# Altium PCB logi-edu.PcbDoc (part 2 of 2)
Units mil, origin at the board's own origin, x right, y up, seen from the top; angles counter-clockwise.
Board outline 3607 x 2055 mil, 4 copper layers (Top Layer, Mid-Layer 1, Mid-Layer 2, Bottom Layer); 75 components, 66 nets, 321 pads, 127 vias.
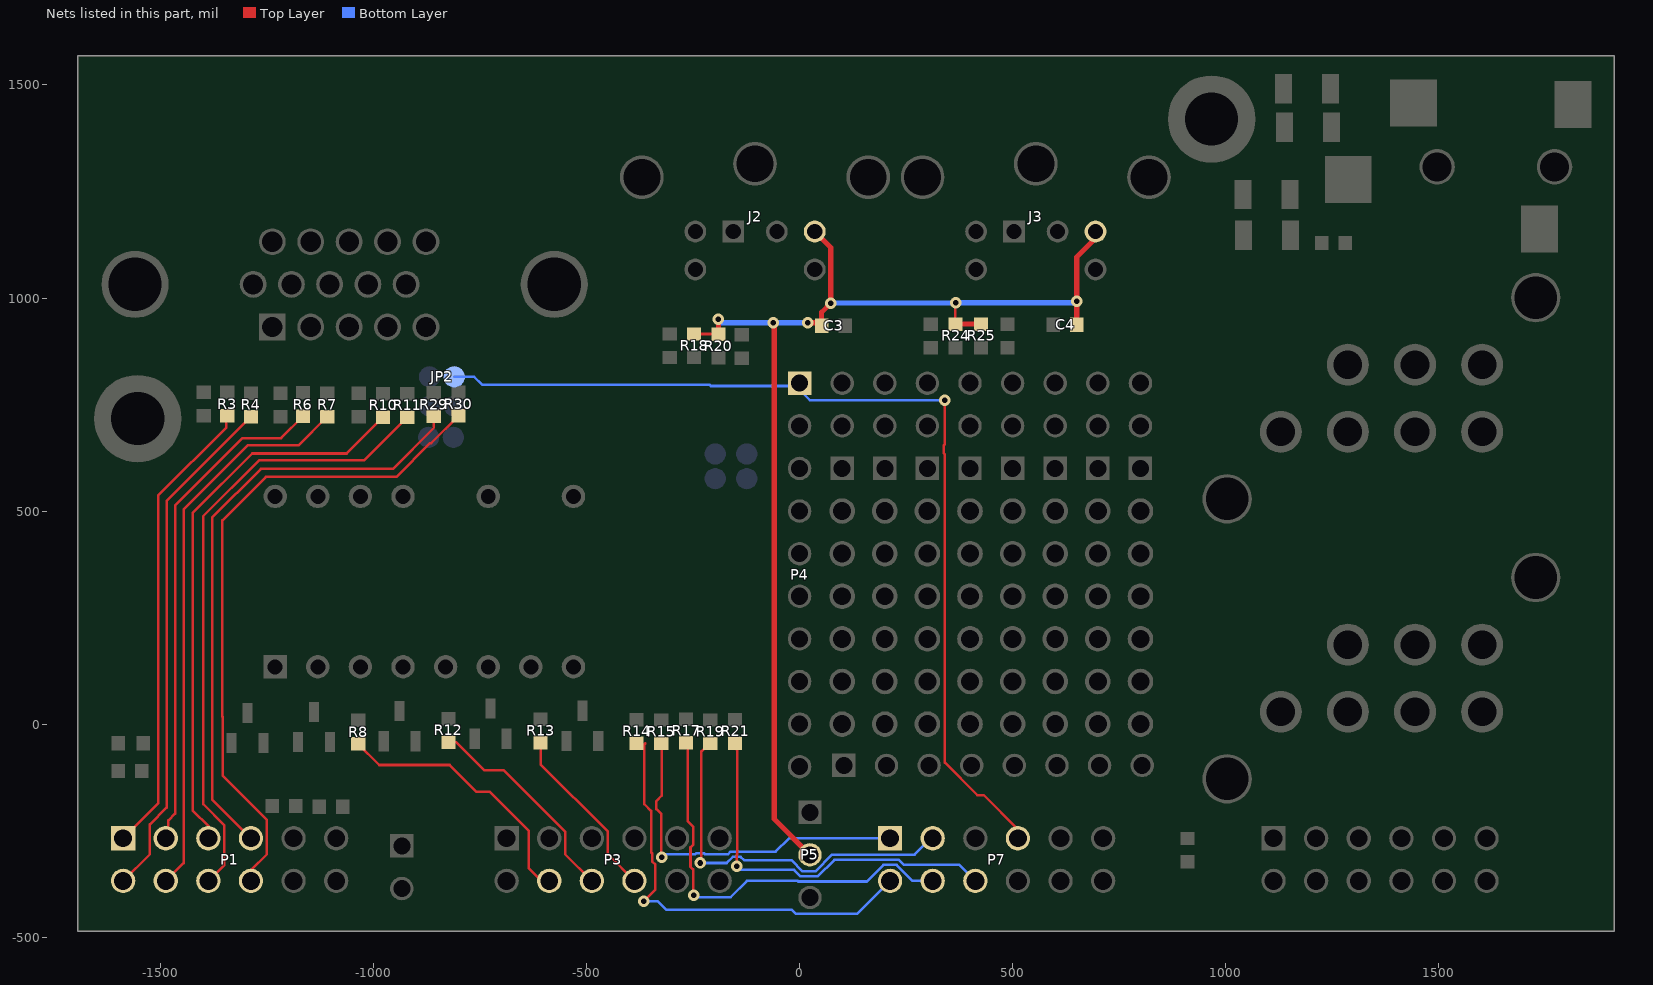
[diagram p2: the nets of this part, all layers, seen from the top]

## Via types
v1: diameter 27, hole 13, Top Layer to Bottom Layer, 127 vias

## Nets (pads, with @x,y where several pads share a name; then routed paths per layer and width w, separated by ;. In a path a pad name is that pad's centre, name@x,y a point inside that pad or via, vN(x,y) a via of type N, cw(c..) or ccw(c..) an arc to the next point about the centre after c; other vN are vias at no path point) (continued)
SSEG0_A: P7.8 R17.2 | length 977.7
  Top Layer w6: R17.2@-262.06,-45.56 -262.06,-228.47 -250.06,-240.47 -250.06,-283.53 -256.06,-289.53 -256.06,-335.32 -250.06,-341.32 -250.06,-400.5 v1(-248.56,-402)
  Bottom Layer w6: v1(-248.56,-402) -244.56,-406 -161.56,-406 -123.56,-368 -4.12,-368 -2.62,-369.5 157.91,-369.5 196.91,-330.5 227.97,-330.5 265.47,-368 P7.8@312.44,-368
SSEG1_B: P7.7 R14.2 | length 1016.2
  Top Layer w6: v1(-366,-416) -338.56,-388.56 -338.56,-329.82 -346.06,-322.32 -346.06,-303.68 -348.56,-301.18 -348.56,-203.79 -364.56,-187.79 -364.56,-47.56 -362.56,-45.56
  Bottom Layer w6: v1(-366,-416) -332.6,-416 -312.6,-436 -18.29,-436 -8.79,-445.5 134.94,-445.5 P7.7@212.44,-368
SSEG2_C: P7.2 R19.2 | length 893.5
  Top Layer w6: v1(-233.56,-326) -230.56,-323 -230.56,-64.31 R19.2@-211.81,-45.56
  Bottom Layer w6: v1(-233.56,-326) -171.38,-326 -156.88,-311.5 -138.24,-311.5 -130.24,-319.5 -18.68,-319.5 7.32,-345.5 37.56,-345.5 76.56,-306.5 269.94,-306.5 P7.2@315.44,-261
SSEG3_D: P3.8 R8.2 | length 644.6
  Top Layer w6: R8.2@-1036,-46.56 -986.56,-96 -821.56,-96 -758.56,-159 -726.83,-159 -636,-249.83 -636,-338 -592,-382 P3.8@-592,-375 ; P3.8@-590,-375 P3.8@-590,-372
SSEG4_E: P3.9 R12.2 | length 505.9
  Top Layer w6: R12.2@-824,-42.56 -806,-42.56 -740.56,-108 -694.53,-108 -550.06,-252.47 -550.06,-305.5 P3.9@-488.56,-367 ; P3.9@-487.56,-368 P3.9@-488.56,-367 ; P3.9@-485,-367 P3.9@-488.56,-367
SSEG5_F: P7.9 R21.2 | length 901.5
  Top Layer w6: R21.2@-161.56,-45.56 -146.56,-60.56 -146.56,-305 -147.56,-306 v1(-147.56,-334)
  Bottom Layer w6: v1(-147.56,-334) -139.56,-342 -13.15,-342 2.35,-357.5 42.53,-357.5 81.53,-318.5 232.94,-318.5 244.94,-330.5 374.94,-330.5 P7.9@412.44,-368
SSEG6_G: P7.1 R15.2 | length 838.8
  Top Layer w6: v1(-323.56,-313) -325.06,-311.5 -325.06,-210.32 -336.06,-199.32 -336.06,-180.68 -323.56,-168.18 -323.56,-56.81 R15.2@-312.31,-45.56
  Bottom Layer w6: v1(-323.56,-313) -316.06,-305.5 -244.88,-305.5 -242.88,-303.5 -224.24,-303.5 -222.24,-305.5 -167.85,-305.5 -161.85,-299.5 -56.06,-299.5 -24.56,-268 P7.1@212.44,-268
SSEG7_DP: P3.10 R13.2 | length 415.8
  Top Layer w6: R13.2@-608,-43.56 -608,-94.53 -450.06,-252.47 -450.06,-305.5 P3.10@-387.56,-368
VDD_PS2: C3.2 C4.2 J2.4 J3.4 P5.2 R18.2 R20.2 R24.2 R25.2 | length 2782.3
  Top Layer w6: R18.2@-247.56,915.56 -191.56,915.56 R20.2@-190.56,914.56 ; R24.2@365.44,938.56 365.44,988 v1(366.44,989)
  Top Layer w12: R20.2@-190.56,914.56 v1(-190.56,950) ; v1(-61.56,942) -59.56,940 -59.56,-223 P5.2@24.44,-307 ; v1(19.44,942) 51.88,942 51.88,966.69 v1(73.19,988) 73.19,1118.39 J2.4@35.6,1155.98 ; R24.2@366,938.56 R25.2@426,938.56 ; C4.2@650.56,937 650.56,1096.56 J3.4@701,1147
  Bottom Layer w12: v1(-190.56,950) -182.56,942 v1(-61.56,942) v1(19.44,942) ; v1(73.19,988) 365.44,988 v1(366.44,989) 647.44,989 v1(650.44,992)
VGA_B1: P1.9 R11.1 | length 1467.3
  Top Layer w6: P1.9@-1387.56,-368 -1350.06,-330.5 -1350.06,-237.5 -1399.56,-188 -1399.56,488 -1268.56,619 -1022,619 R11.1@-920.56,720.44
VGA_B2: P1.3 R10.1 | length 1319.5
  Top Layer w6: P1.3@-1387.56,-268 -1386.56,-267 -1386.56,-240.88 -1424.56,-202.88 -1424.56,495 -1284.56,635 -1063,635 R10.1@-977.56,720.44
VGA_G0_IO1: JP2.1 P4.1 P7.4 | length 2305.2
  Top Layer w6: v1(340.44,760) 340.94,759.5 340.94,656.76 338.5,654.32 338.5,635.68 340.94,633.24 340.94,-90.5 417.44,-167 432.44,-167 512.44,-247 P7.4@512.44,-268
  Bottom Layer w6: JP2.1@-810.56,815 -763.56,815 -745.06,796.5 -211.32,796.5 -208.32,793.5 -22.5,793.5 P4.1@-16,800 ; P4.1@0,800 P4.1@-16,800 ; v1(340.44,760) 24,760 P4.1@-16,800
VGA_G1: P1.8 R7.1 | length 1316.5
  Top Layer w6: P1.8@-1487.56,-368 -1445.56,-326 -1445.56,504 -1295.56,654 -1176,654 R7.1@-1108.56,721.44
VGA_G2: P1.2 R6.1 | length 1176.9
  Top Layer w6: P1.2@-1487.56,-268 -1481.56,-262 -1481.56,-225.94 -1465.56,-209.94 -1465.56,513 -1307.56,671 -1217,671 R6.1@-1165.56,722.44
VGA_HS: P1.4 R29.2 | length 1425.1
  Top Layer w6: P1.4@-1287.56,-268 -1378.56,-177 -1378.56,485 -1264.56,599 -954.56,599 -858.56,695 R29.2@-858.56,722.44
VGA_R1: P1.7 R4.1 | length 1226.7
  Top Layer w6: P1.7@-1597,-377 P1.7@-1587.78,-367.78 ; P1.7@-1587.56,-368 -1525.06,-305.5 -1525.06,-235.5 -1485.56,-196 -1485.56,523.44 R4.1@-1287.56,721.44
VGA_R2: P1.1 R3.1 | length 1091.7
  Top Layer w6: P1.1@-1587.56,-268 -1505.56,-186 -1505.56,536 -1345.56,696 R3.1@-1345.56,723.44
VGA_VS: P1.10 R30.2 | length 1569.3
  Top Layer w6: P1.10@-1287,-377 -1287,-342.44 -1250.06,-305.5 -1250.06,-224.71 -1354.21,-120.55 -1354.21,17.35 -1354.56,17.69 -1354.56,478 -1252.56,580 -946.56,580 -867.06,659.5 -864.5,659.5 R30.2@-800.56,723.44
pads on no net: J1.4 J1.9 J1.11 J1.12 J1.15 J1.X J2.2 J2.6 J2.x J3.2 J3.6 J3.x J4.5 J4.6 J4.8 J4.9 J5.5 J5.6 J5.8 J5.9 J6.4 J6.H1 J6.H2 P3.6 P3.12 P7.6 P7.12 P8.6 P8.12 P11.1 P12.1 P13.1 P14.1 P15.1 P16.1 SSEG1.9

## Polygon pours and split planes (outlines as drawn)
GND on Bottom Layer "GND_BOT" (solid, remove dead copper, pour order 4): -1682.56,1559 -1682.56,-486 1875,-486 1875,1532.78 1875,1559 -1682.56,1559
GND on Top Layer "GND_TOP" (solid, remove dead copper, pour order 3): -1696.56,1560 -1696.56,-486 1875,-486 1875,1533.77 1875,1560 -1696.56,1560

## Keep-outs
Keep-Out Layer:
  the board outline again, w30

## Silkscreen, mask and mechanical layers (free items; w line width, h text height)
Top Overlay:
  lines w10: -37.19,851 846.06,851 ; -36.75,851 -36.75,-140 37.5,-140 ; 37,759 382,759 ; 37.5,-60 846.5,-60 846.5,-140 ; 37.5,851 37.5,-140 ; 38,552 348,552 ; 39,660 372,660 ; 277.44,985 308.25,985 ; 513,758 843,758 844,759 ; 526,659 845,659 ; 540,552 845,552 ; 846.5,851 846.5,-140 ; 37.5,-140 846.5,-140
  text "VGA" at -1028.56,1556 h80 r180
  text "PS2-2" at 1.44,1553 h80 r180
  text "PS2-1 - DEFAULT" at 828.44,1552 h80 r180
  text "AUDIO" at 1738,1542 h80 r180
  text "S1" at 111,859 h60 r90
  text "S2" at 216,859 h60 r90
  text "S8" at 813,859 h60 r90
  text "S7" at 716,858 h60 r90
  text "IO1" at -79.17,855.51 h50 r270
  text "GND" at 892,777 h60
  text "IO2" at -79.17,752.39 h50 r270
  text "GND" at 394,734 h60
  text "VEXT" at 892,696 h60
  text "NES2" at 1894.44,686 h80 r90
  text "IO3" at -80.56,645 h50 r270
  text "VEXT" at 387,633 h60
  text "SERVO" at 892,604 h60
  text "S1" at 167,570 h60 r90
  text "S2" at 268,568 h60 r90
  text "IO4" at -79.17,535.33 h50 r270
  text "SERVO" at 366,533 h60
  text "IO5" at -79.17,435.49 h50 r270
  text "IO6" at -79.17,335.19 h50 r270
  text "IO7" at -79.17,228.9 h50 r270
  text "IO8" at -79.07,131.19 h50 r270
  text "NES1" at 1892.44,60 h80 r90
  text "IO9" at -79.17,38.82 h50 r270
  text "PWR" at -1628.56,-18 h60
  text "IO10" at -80.56,-56 h50 r270
  text "3V" at 182.44,-184 h60
  text "3V" at 277.44,-184 h60
  text "3V" at 376.44,-184 h60
  text "----" at 718.44,-184 h60
  text "3V" at 95.44,-185 h60
  text "----" at 489.44,-186 h60
  text "GND" at 592.44,-187 h60
  text "VEXT" at -156,-222 h60
  text "5V" at -837.56,-306 h60 r90
  text "PS2" at -124.56,-325 h60
  text "MAX!" at -787.56,-336 h60 r90
  text "3V3" at -125.56,-419 h60
  text "EXT VIN" at -991.56,-441 h60 r90
  text "GND" at -836.56,-444 h60 r90
  text "PS2 V SEL" at 122.44,-451 h60 r90
Bottom Overlay:
  lines w10: 37.5,-60 846.5,-60 846.5,-140 ; 38,759 387,759 ; 39.81,840 37.5,837.69 37.5,-140 ; 40,552 352,552 ; 41,660 368,660 ; 513,758 843,758 844,759 ; 516,659 847,659 ; 531,552 845,552 ; 37.5,-140 -36.75,-140 -36.75,840 846.5,840 846.5,-140 ; 37.5,-140 846.5,-140
  text "S8" at 816,910 h60 r90
  text "S2" at 214,907 h60 r90
  text "S7" at 719,906 h60 r90
  text "S1" at 112,904 h60 r90
  text "G3" at -908.56,791 h80
  text "GND" at 973,778 h60
  text "IO1" at -79.56,765 h50 r270
  text "PS2-SERVO" at -239,755 h60 r90
  text "GND" at 504,733 h60
  text "B3" at -915.56,722 h80
  text "VEXT" at 990,681 h60
  text "IO2" at -79.56,665 h50 r270
  text "R3" at -914.56,649 h80
  text "VEXT" at 509,633 h60
  text "S2" at 268,627 h60 r90
  text "S1" at 167,624 h60 r90
  text "PWM" at 984,584 h60
  text "IO3" at -82.56,559 h50 r270
  text "S2" at -183,542 h60 r90
  text "S1" at -121,540 h60 r90
  text "SERVO" at 525,534 h60
  text "IO4" at -84.56,463 h50 r270
  text "IO5" at -77.56,361 h50 r270
  text "IO6" at -77.56,260 h50 r270
  text "IO7" at -78.56,167 h50 r270
  text "IO8" at -79,74 h50 r270
  text "IO9" at -80,-14 h50 r270
  text "IO10" at -79,-144 h50 r270
  text "----" at 718.44,-184 h60
  text "3V" at 427,-186 h60
  text "----" at 489.44,-186 h60
  text "3V" at 227,-188 h60
  text "3V" at 325,-188 h60
  text "GND" at 697,-188 h60
  text "3V" at 127,-189 h60
Top Paste:
  text "PS2 V SEL" at 39.44,-514 h60
Top Solder:
  text "R1.0" at -752.56,752 h60
  text "LOGi-EDU" at -624.56,714 h80
Bottom Solder:
  text "LOGi-EDU R1.0" at -639.56,359 h100
  text "V2014.03.21" at -641.56,282 h100
Mechanical 2:
  lines w10: -1835.89,-409.73 -1816.57,-469.95 ; -1826.57,-469.84 -1806.57,-470.07 ; -1814.65,1482.7 -1793.97,1542.47 ; -1809.66,145.4 -1816.57,-469.95 ; -1803.97,1542.58 -1783.97,1542.36 ; -1800.88,927.11 -1793.97,1542.47 ; -1795.9,-410.18 -1816.57,-469.95 ; -1774.65,1482.25 -1793.97,1542.47 ; -1677.59,-635.91 -1677.4,-615.91 ; -1617.68,-646.46 -1677.5,-625.91 ; -1617.31,-606.46 -1677.5,-625.91 ; -276.89,-638.81 -1677.5,-625.91 ; 514.83,-646.1 1915.44,-659 ; 1855.26,-678.45 1915.44,-659 ; 1855.63,-638.45 1915.44,-659 ; 1915.35,-669 1915.53,-649
  text "2012.553 (mil)" at -1773.56,155 h60 r89.36
  text "3593.089 (mil)" at -267.22,-674.89 h60 r359.47
Mechanical 3:
  lines w20: -3954.52,-258 -1554.52,-258 ; -3954.52,1842 4995.48,1842
  text "PCB Fabrication Notes" at -3934.52,1962 h150
  text "Unless otherwise specified, all dimensions are in inches" at -3965.56,1642 h100
  text "Overall Dimension:  \"  x  \"" at -3965.56,1542 h100
  text "Finished Thickness:  .062\"" at -3965.56,1442 h100
  text "Layer Count: 2" at -3965.56,1342 h100
  text "Min Thru Hole: 13 mil" at -3965.56,1253 h100
  text "Annular Ring: 7 mil" at -3965.56,1160 h100
  text "Min Trace/Space: 6 mil" at -3965.56,1065 h100
  text "Drill Count:" at -3965.56,959 h100
  text ".hole_Count" at -3370.52,959 h100
  text "PAD Count:" at -3965.56,859 h100
  text ".pad_Count" at -3370.52,859 h100
  text "Component Count:" at -3965.56,759 h100
  text ".Component_Count" at -3170.52,759 h100
  text "Via Count:" at -3965.56,659 h100
  text ".Via_Count" at -3370.52,659 h100
  text "Plating: Gold ENIG" at -3965.56,437.73 h100
  text "Solder Mask:  Black" at -3965.56,338 h100
  text "Legend:  White Non-Conductive Ink LPI Process" at -3965.56,238 h100
  text "RS274-X Gerber Format, 2.5 Leading Zeros Suppressed" at -3965.56,138 h100
  text "Excellon Drill Format, 2.5 Trailing Zeros Suppressed" at -3965.56,38 h100
  text "Layer Details" at -3954.52,-158 h100
  text "4-Layer Stackup" at -3154.52,-158 h100
  text "POLARITY" at -2254.52,-158 h100
  text ".GTL - Top Copper" at -3954.52,-358 h100
  text "POSITIVE" at -2254.52,-358 h100
  text ".G1 - Inner Copper (Ground)" at -3954.52,-458 h100
  text "POSITIVE" at -2254.52,-458 h100
  text ".G2 - Inner Copper (VDD)" at -3954.52,-558 h100
  text "POSITIVE" at -2254.52,-558 h100
  text ".GBL - Bottom Copper" at -3954.52,-658 h100
  text "POSITIVE" at -2255.56,-658.46 h100
  text ".GTO - Top Silkscreen" at -3954.52,-858 h100
  text ".GBO - Bottom Silkscreen" at -3954.52,-958 h100
  text ".GTP - Top Solder Paste" at -3954.52,-1058 h100
  text ".GBP - Bottom Solder Paste" at -3954.52,-1158 h100
  text ".GTS -  Top Solder Mask" at -3954.52,-1258 h100
  text ".GBS - Bottom Solder Mask" at -3954.52,-1358 h100
  text ".GKO - Board Outline" at -3954.52,-1458 h100
  text ".GM1 - 3D Part Bodies - System" at -3954.52,-1558 h100
  text ".GM2 - Board Dimensions" at -3954.52,-1658 h100
  text ".GM3 - Single Board Fabrication Notes" at -3954.52,-1758 h100
  text ".GM4 - Single Board Score/Tab Route" at -3954.52,-1858 h100
  text ".GM13 - 3D Body Alt" at -3954.52,-1958 h100
  text ".GM15 - Assembly Outlines - Top" at -3954.52,-2058 h100
  text ".GM20 - Panel Dimensions" at -3954.52,-2158 h100
  text ".GM21 - Panel Score/Tab Route" at -3954.52,-2258 h100
  text ".GM22 - Panel Dimensions" at -3954.52,-2358 h100
  text ".TXT/.DRL - NC-Drill" at -3954.52,-2558 h100
Generic Top Title Block:
  lines w0: 5727.27,-2757.5 3334.27,-2757.5 3334.27,-2167.69 5727.27,-2167.69
  lines w8: 4032.22,-2757.5 4032.22,-2167.69 ; 4032.22,-2560.9 5727.27,-2560.9 ; 4032.22,-2364.29 5727.27,-2364.29 ; 4580.62,-2560.9 4580.62,-2364.29 ; 5727.27,-2757.5 3334.27,-2757.5 3334.27,-2167.69 5727.27,-2167.69
  lines w10: -4172.56,-1858 -4072.56,-1858 ; -4172.56,-858 -4072.56,-858 -4072.56,142 -4172.56,142 ; -4172.56,1142 -4072.56,1142 ; -4172.56,2142 -4072.56,2142 ; -4172.56,3142 -4072.56,3142 ; -4172.56,4142 -4072.56,4142 ; -3172.56,-2858 -3172.56,-2758 ; -3172.56,4542 -3172.56,4642 ; -2172.56,-2858 -2172.56,-2758 ; -2172.56,4542 -2172.56,4642 ; -1172.56,-2858 -1172.56,-2758 ; -1172.56,4542 -1172.56,4642 ; -172.56,-2858 -172.56,-2758 ; -172.56,4542 -172.56,4642 ; 827.44,-2858 827.44,-2758 ; 827.44,4542 827.44,4642 ; 1827.44,-2858 1827.44,-2758 ; 1827.44,4542 1827.44,4642 ; 2827.44,-2858 2827.44,-2758 ; 2827.44,4542 2827.44,4642 ; 3827.44,-2858 3827.44,-2758 ; 3827.44,4542 3827.44,4642 ; 4827.44,-2858 4827.44,-2758 ; 4827.44,4542 4827.44,4642 ; 5727.27,-2757.5 5727.27,-2167.69 ; 5727.44,-1858 5827.44,-1858 ; 5727.44,-858 5827.44,-858 5827.44,142 5727.44,142 ; 5727.44,1142 5827.44,1142 ; 5727.44,2142 5827.44,2142 ; 5727.44,3142 5827.44,3142 ; 5727.44,4142 5827.44,4142 ; 5827.44,-2758 5827.44,-2858 ; 5827.44,-2858 -4172.56,-2858 -4172.56,4642 5827.44,4642 5827.44,-2858 ; -4072.56,-2758 5727.44,-2758 5727.44,4542 -4072.56,4542 -4072.56,-2758
  text "1" at -3707.56,4562 h60
  text "2" at -2632.56,4562 h60
  text "3" at -1682.56,4562 h60
  text "4" at -632.56,4562 h60
  text "5" at 317.44,4562 h60
  text "6" at 1342.44,4562 h60
  text "7" at 2292.44,4562 h60
  text "8" at 3267.44,4562 h60
  text "9" at 4367.44,4562 h60
  text "10" at 5317.44,4562 h60
  text "H" at -4157.56,4307 h60
  text "H" at 5747.44,4302 h60
  text "G" at -4157.56,3582 h60
  text "G" at 5747.44,3577 h60
  text "F" at -4147.56,2597 h60
  text "F" at 5757.44,2592 h60
  text "E" at -4157.56,1632 h60
  text "E" at 5747.44,1627 h60
  text "D" at -4157.56,632 h60
  text "D" at 5747.44,627 h60
  text "C" at -4147.56,-338 h60
  text "C" at 5757.44,-343 h60
  text "B" at -4152.56,-1383 h60
  text "B" at 5752.44,-1388 h60
  text ".PCB_TITLE" at 4081.44,-2305 h60
  text "" at 3832.81,-2319.77 h60
  text "" at 3914.93,-2319.77 h60
  text "A" at -4147.56,-2383 h60
  text "A" at 5757.44,-2388 h60
  text "R" at 4082.08,-2513.4 h60
  text "e" at 4136.82,-2513.4 h60
  text "v" at 4191.57,-2513.4 h60
  text ":" at 4246.31,-2513.4 h60
  text "2" at 3384.12,-2520.46 h60
  text ".PCB_VERSION" at 4309.44,-2521 h60
  text ".ENGINEER" at 4637.44,-2522 h60
  text "" at 3583.54,-2532.56 h60
  text "" at 3734.09,-2532.56 h60
  text "W" at 3384.12,-2611.7 h60
  text "a" at 3466.24,-2611.7 h60
  text "v" at 3520.98,-2611.7 h60
  text "e" at 3575.73,-2611.7 h60
  text "n" at 3630.47,-2611.7 h60
  text "u" at 3685.22,-2611.7 h60
  text "m" at 3739.96,-2611.7 h60
  text "b" at 3822.08,-2611.7 h60
  text "e" at 3876.83,-2611.7 h60
  text "r" at 3931.57,-2611.7 h60
  text ".GERBER_GEN_DATE" at 4066.44,-2706 h60
  text "T" at 3384.12,-2710 h60
  text "e" at 3438.87,-2710 h60
  text "c" at 3493.61,-2710 h60
  text "h" at 3534.67,-2710 h60
  text "n" at 3589.41,-2710 h60
  text "o" at 3644.16,-2710 h60
  text "l" at 3698.9,-2710 h60
  text "o" at 3726.28,-2710 h60
  text "g" at 3781.02,-2710 h60
  text "i" at 3835.77,-2710 h60
  text "e" at 3863.14,-2710 h60
  text "s" at 3917.88,-2710 h60
  text "1" at -3697.56,-2833 h60
  text "2" at -2622.56,-2833 h60
  text "3" at -1672.56,-2833 h60
  text "4" at -622.56,-2833 h60
  text "5" at 327.44,-2833 h60
  text "6" at 1352.44,-2833 h60
  text "7" at 2302.44,-2833 h60
  text "8" at 3277.44,-2833 h60
  text "9" at 4377.44,-2833 h60
  text "10" at 5327.44,-2833 h60
PCB Notes Title Block:
  lines w0: 5727.27,-2757.5 3334.27,-2757.5 3334.27,-2167.69 5727.27,-2167.69
  lines w8: 4032.22,-2757.5 4032.22,-2167.69 ; 4032.22,-2560.9 5727.27,-2560.9 ; 4032.22,-2364.29 5727.27,-2364.29 ; 4580.62,-2560.9 4580.62,-2364.29 ; 5727.27,-2757.5 3334.27,-2757.5 3334.27,-2167.69 5727.27,-2167.69
  lines w10: -4172.56,-1858 -4072.56,-1858 ; -4172.56,-858 -4072.56,-858 -4072.56,142 -4172.56,142 ; -4172.56,1142 -4072.56,1142 ; -4172.56,2142 -4072.56,2142 ; -4172.56,3142 -4072.56,3142 ; -4172.56,4142 -4072.56,4142 ; -3172.56,-2858 -3172.56,-2758 ; -3172.56,4542 -3172.56,4642 ; -2172.56,-2858 -2172.56,-2758 ; -2172.56,4542 -2172.56,4642 ; -1172.56,-2858 -1172.56,-2758 ; -1172.56,4542 -1172.56,4642 ; -172.56,-2858 -172.56,-2758 ; -172.56,4542 -172.56,4642 ; 827.44,-2858 827.44,-2758 ; 827.44,4542 827.44,4642 ; 1827.44,-2858 1827.44,-2758 ; 1827.44,4542 1827.44,4642 ; 2827.44,-2858 2827.44,-2758 ; 2827.44,4542 2827.44,4642 ; 3827.44,-2858 3827.44,-2758 ; 3827.44,4542 3827.44,4642 ; 4827.44,-2858 4827.44,-2758 ; 4827.44,4542 4827.44,4642 ; 5727.27,-2757.5 5727.27,-2167.69 ; 5727.44,-1858 5827.44,-1858 ; 5727.44,-858 5827.44,-858 5827.44,142 5727.44,142 ; 5727.44,1142 5827.44,1142 ; 5727.44,2142 5827.44,2142 ; 5727.44,3142 5827.44,3142 ; 5727.44,4142 5827.44,4142 ; 5827.44,-2758 5827.44,-2858 ; 5827.44,-2858 -4172.56,-2858 -4172.56,4642 5827.44,4642 5827.44,-2858 ; -4072.56,-2758 5727.44,-2758 5727.44,4542 -4072.56,4542 -4072.56,-2758
  text "1" at -3707.56,4562 h60
  text "2" at -2632.56,4562 h60
  text "3" at -1682.56,4562 h60
  text "4" at -632.56,4562 h60
  text "5" at 317.44,4562 h60
  text "6" at 1342.44,4562 h60
  text "7" at 2292.44,4562 h60
  text "8" at 3267.44,4562 h60
  text "9" at 4367.44,4562 h60
  text "10" at 5317.44,4562 h60
  text "H" at -4157.56,4307 h60
  text "H" at 5747.44,4302 h60
  text "G" at -4157.56,3582 h60
  text "G" at 5747.44,3577 h60
  text "F" at -4147.56,2597 h60
  text "F" at 5757.44,2592 h60
  text "E" at -4157.56,1632 h60
  text "E" at 5747.44,1627 h60
  text "D" at -4157.56,632 h60
  text "D" at 5747.44,627 h60
  text "C" at -4147.56,-338 h60
  text "C" at 5757.44,-343 h60
  text "B" at -4152.56,-1383 h60
  text "B" at 5752.44,-1388 h60
  text ".PCB_TITLE" at 4081.44,-2305 h60
  text "" at 3832.81,-2319.77 h60
  text "" at 3914.93,-2319.77 h60
  text "A" at -4147.56,-2383 h60
  text "A" at 5757.44,-2388 h60
  text "R" at 4082.08,-2513.4 h60
  text "e" at 4136.82,-2513.4 h60
  text "v" at 4191.57,-2513.4 h60
  text ":" at 4246.31,-2513.4 h60
  text "2" at 3384.12,-2520.46 h60
  text ".PCB_VERSION" at 4309.44,-2521 h60
  text ".ENGINEER" at 4637.44,-2522 h60
  text "" at 3583.54,-2532.56 h60
  text "" at 3734.09,-2532.56 h60
  text "W" at 3384.12,-2611.7 h60
  text "a" at 3466.24,-2611.7 h60
  text "v" at 3520.98,-2611.7 h60
  text "e" at 3575.73,-2611.7 h60
  text "n" at 3630.47,-2611.7 h60
  text "u" at 3685.22,-2611.7 h60
  text "m" at 3739.96,-2611.7 h60
  text "b" at 3822.08,-2611.7 h60
  text "e" at 3876.83,-2611.7 h60
  text "r" at 3931.57,-2611.7 h60
  text ".GERBER_GEN_DATE" at 4066.44,-2706 h60
  text "T" at 3384.12,-2710 h60
  text "e" at 3438.87,-2710 h60
  text "c" at 3493.61,-2710 h60
  text "h" at 3534.67,-2710 h60
  text "n" at 3589.41,-2710 h60
  text "o" at 3644.16,-2710 h60
  text "l" at 3698.9,-2710 h60
  text "o" at 3726.28,-2710 h60
  text "g" at 3781.02,-2710 h60
  text "i" at 3835.77,-2710 h60
  text "e" at 3863.14,-2710 h60
  text "s" at 3917.88,-2710 h60
  text "1" at -3697.56,-2833 h60
  text "2" at -2622.56,-2833 h60
  text "3" at -1672.56,-2833 h60
  text "4" at -622.56,-2833 h60
  text "5" at 327.44,-2833 h60
  text "6" at 1352.44,-2833 h60
  text "7" at 2302.44,-2833 h60
  text "8" at 3277.44,-2833 h60
  text "9" at 4377.44,-2833 h60
  text "10" at 5327.44,-2833 h60
Fabrication Reference  Title Block:
  lines w0: 5727.27,-2757.5 3334.27,-2757.5 3334.27,-2167.69 5727.27,-2167.69
  lines w8: 4032.22,-2757.5 4032.22,-2167.69 ; 4032.22,-2560.9 5727.27,-2560.9 ; 4032.22,-2364.29 5727.27,-2364.29 ; 4580.62,-2560.9 4580.62,-2364.29 ; 5727.27,-2757.5 3334.27,-2757.5 3334.27,-2167.69 5727.27,-2167.69
  lines w10: -4172.56,-1858 -4072.56,-1858 ; -4172.56,-858 -4072.56,-858 -4072.56,142 -4172.56,142 ; -4172.56,1142 -4072.56,1142 ; -4172.56,2142 -4072.56,2142 ; -4172.56,3142 -4072.56,3142 ; -4172.56,4142 -4072.56,4142 ; -3172.56,-2858 -3172.56,-2758 ; -3172.56,4542 -3172.56,4642 ; -2172.56,-2858 -2172.56,-2758 ; -2172.56,4542 -2172.56,4642 ; -1172.56,-2858 -1172.56,-2758 ; -1172.56,4542 -1172.56,4642 ; -172.56,-2858 -172.56,-2758 ; -172.56,4542 -172.56,4642 ; 827.44,-2858 827.44,-2758 ; 827.44,4542 827.44,4642 ; 1827.44,-2858 1827.44,-2758 ; 1827.44,4542 1827.44,4642 ; 2827.44,-2858 2827.44,-2758 ; 2827.44,4542 2827.44,4642 ; 3827.44,-2858 3827.44,-2758 ; 3827.44,4542 3827.44,4642 ; 4827.44,-2858 4827.44,-2758 ; 4827.44,4542 4827.44,4642 ; 5727.27,-2757.5 5727.27,-2167.69 ; 5727.44,-1858 5827.44,-1858 ; 5727.44,-858 5827.44,-858 5827.44,142 5727.44,142 ; 5727.44,1142 5827.44,1142 ; 5727.44,2142 5827.44,2142 ; 5727.44,3142 5827.44,3142 ; 5727.44,4142 5827.44,4142 ; 5827.44,-2758 5827.44,-2858 ; 5827.44,-2858 -4172.56,-2858 -4172.56,4642 5827.44,4642 5827.44,-2858 ; -4072.56,-2758 5727.44,-2758 5727.44,4542 -4072.56,4542 -4072.56,-2758
  text "1" at -3707.56,4562 h60
  text "2" at -2632.56,4562 h60
  text "3" at -1682.56,4562 h60
  text "4" at -632.56,4562 h60
  text "5" at 317.44,4562 h60
  text "6" at 1342.44,4562 h60
  text "7" at 2292.44,4562 h60
  text "8" at 3267.44,4562 h60
  text "9" at 4367.44,4562 h60
  text "10" at 5317.44,4562 h60
  text "H" at -4157.56,4307 h60
  text "H" at 5747.44,4302 h60
  text "Fabrication Reference Drawing" at -2487.56,4122 h60
  text "G" at -4157.56,3582 h60
  text "G" at 5747.44,3577 h60
  text "F" at -4147.56,2597 h60
  text "F" at 5757.44,2592 h60
  text "E" at -4157.56,1632 h60
  text "E" at 5747.44,1627 h60
  text "D" at -4157.56,632 h60
  text "D" at 5747.44,627 h60
  text "C" at -4147.56,-338 h60
  text "C" at 5757.44,-343 h60
  text "B" at -4152.56,-1383 h60
  text "B" at 5752.44,-1388 h60
  text ".PCB_TITLE" at 4081.44,-2305 h60
  text "" at 3832.81,-2319.77 h60
  text "" at 3914.93,-2319.77 h60
  text "A" at -4147.56,-2383 h60
  text "A" at 5757.44,-2388 h60
  text "R" at 4082.08,-2513.4 h60
  text "e" at 4136.82,-2513.4 h60
  text "v" at 4191.57,-2513.4 h60
  text ":" at 4246.31,-2513.4 h60
  text "2" at 3384.12,-2520.46 h60
  text ".PCB_VERSION" at 4309.44,-2521 h60
  text ".ENGINEER" at 4637.44,-2522 h60
  text "" at 3583.54,-2532.56 h60
  text "" at 3734.09,-2532.56 h60
  text "W" at 3384.12,-2611.7 h60
  text "a" at 3466.24,-2611.7 h60
  text "v" at 3520.98,-2611.7 h60
  text "e" at 3575.73,-2611.7 h60
  text "n" at 3630.47,-2611.7 h60
  text "u" at 3685.22,-2611.7 h60
  text "m" at 3739.96,-2611.7 h60
  text "b" at 3822.08,-2611.7 h60
  text "e" at 3876.83,-2611.7 h60
  text "r" at 3931.57,-2611.7 h60
  text ".GERBER_GEN_DATE" at 4066.44,-2706 h60
  text "T" at 3384.12,-2710 h60
  text "e" at 3438.87,-2710 h60
  text "c" at 3493.61,-2710 h60
  text "h" at 3534.67,-2710 h60
  text "n" at 3589.41,-2710 h60
  text "o" at 3644.16,-2710 h60
  text "l" at 3698.9,-2710 h60
  text "o" at 3726.28,-2710 h60
  text "g" at 3781.02,-2710 h60
  text "i" at 3835.77,-2710 h60
  text "e" at 3863.14,-2710 h60
  text "s" at 3917.88,-2710 h60
  text "1" at -3697.56,-2833 h60
  text "2" at -2622.56,-2833 h60
  text "3" at -1672.56,-2833 h60
  text "4" at -622.56,-2833 h60
  text "5" at 327.44,-2833 h60
  text "6" at 1352.44,-2833 h60
  text "7" at 2302.44,-2833 h60
  text "8" at 3277.44,-2833 h60
  text "9" at 4377.44,-2833 h60
  text "10" at 5327.44,-2833 h60